# EAGLE board pocketbone (EAGLE 7.5.0)
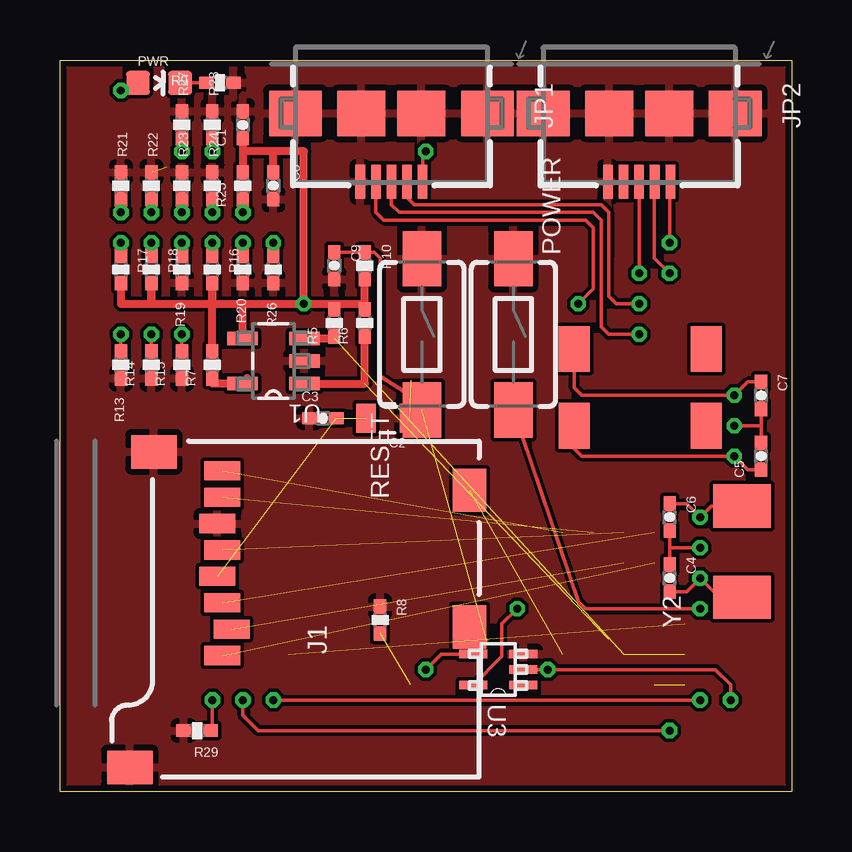
[diagram p0: board, top side]
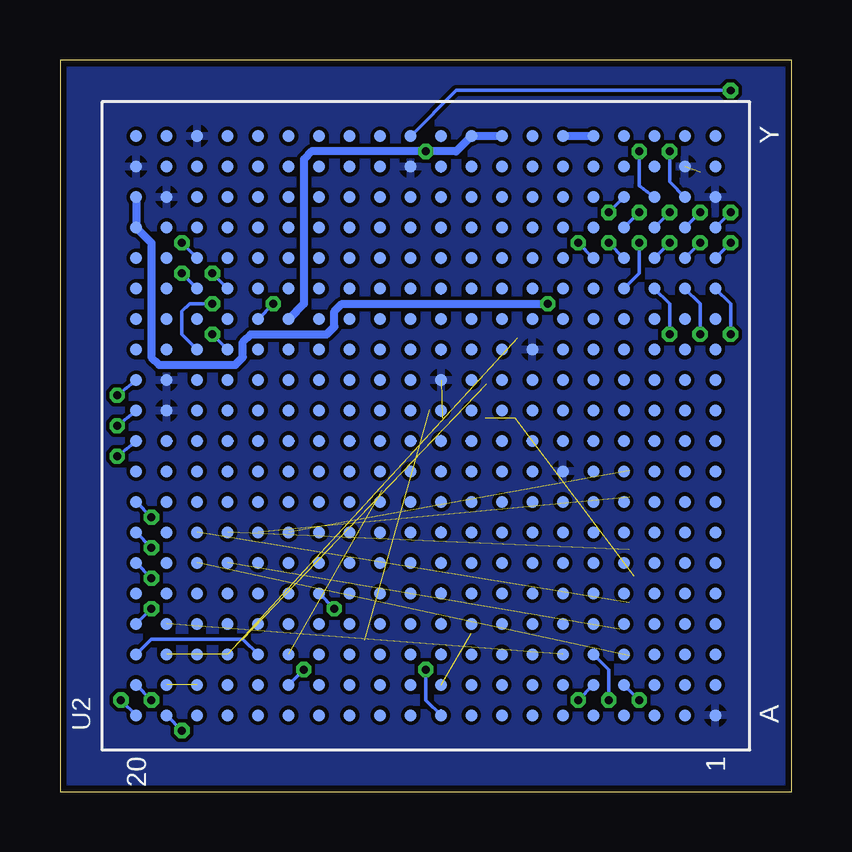
[diagram p1: board, bottom side, seen from below]

Size 30.48 x 30.48 mm. Coordinates in mm from the lower left corner, seen from the top.
Outline: 30.48,0 0,0 0,30.48 30.48,30.48 30.48,0
Copper layers (1*16): Top 0.035mm / dielectric 1.5mm / Bottom 0.035mm
Design rules "SeeedStudio_2layer_DRU_no_angle_20140221": minimum track width 6mil, minimum drill 12mil, track to track 6mil, track to pad 6mil, pad to pad 6mil, via to via 6mil, smd to smd 0mil, copper to edge 10mil, drill to drill 10mil, minimum pad ring 10mil, minimum via ring 6mil, stop-mask expansion 2mil, vias tented up to drill 100mil, thermal gap 10mil
Net classes: 0 default: width 0.152 mm, drill 0.33 mm, clearance 0.152 mm; 1 ground: width 0.33 mm, drill 0.33 mm, clearance 0.152 mm; 2 usb: width 0.152 mm, clearance 0.152 mm; 3 power: width 0.33 mm, drill 0.33 mm, clearance 0.152 mm

## Footprints (pad centres in the part's own frame; a part is rotated, then mirrored left to right if it is on the bottom)
0402-CAP = smd 0.61 x 0.508: 1 -0.559,0; 2 0.559,0
0805 = smd 0.8 x 1.2: 1 -0.9,0; 2 0.9,0
MICRO-SD-SOCKET-PP = smd 1.8 x 1.4: CD1 -2.05,0.4; CD2 -7.75,0.4 | smd 0.8 x 1.5: CD/DAT3 -7.84,10.3; CLK -4.54,10.7; CMD -6.74,10.7; DAT0 -2.34,10.7; DAT1 -1.24,10.7; DAT2 -8.94,10.7; GND -3.44,10.9; VCC -5.64,10.9 | smd 1.4 x 1.9: GND1 -13.6,14.55; GND3 -0.45,13.55
USB-AB-MICRO-SMD = smd 1.4 x 0.4: D+ 2.85,0; D- 2.85,0.65; GND 2.85,-1.3; ID 2.85,-0.65; VBUS 2.85,1.3 | smd 1.9 x 2.2: SHIELD1 0,4; SHIELD4 0,-4 | smd 1.9 x 2: SHIELD2 0,1.25; SHIELD3 0,-1.25
TACTILE-SWITCH-1101NE = smd 2.3 x 1.6: 1 -3.15,0; 2 3.15,0
LED-0603 = smd 1 x 1: A 0,-0.877; C 0,0.877
0402-RES = smd 0.61 x 0.508: 1 -0.559,0; 2 0.559,0
SOT95P290X145-5N = smd 1.27 x 0.559: 1 -1.295,0.94; 2 -1.295,0; 3 -1.295,-0.94; 4 1.295,-0.94; 5 1.295,0.94
OSD3358 = smd 0.5 x 0.5: A1 -12.065,-12.065; A2 -12.065,-10.795; A3 -12.065,-9.525; A4 -12.065,-8.255; A5 -12.065,-6.985; A6 -12.065,-5.715; A7 -12.065,-4.445; A8 -12.065,-3.175; A9 -12.065,-1.905; A10 -12.065,-0.635; A11 -12.065,0.635; A12 -12.065,1.905; A13 -12.065,3.175; A14 -12.065,4.445; A15 -12.065,5.715; A16 -12.065,6.985; A17 -12.065,8.255; A18 -12.065,9.525; A19 -12.065,10.795; A20 -12.065,12.065; B1 -10.795,-12.065; B2 -10.795,-10.795; B3 -10.795,-9.525; B4 -10.795,-8.255; B5 -10.795,-6.985; B6 -10.795,-5.715; B7 -10.795,-4.445; B8 -10.795,-3.175; B9 -10.795,-1.905; B10 -10.795,-0.635; B11 -10.795,0.635; B12 -10.795,1.905; B13 -10.795,3.175; B14 -10.795,4.445; B15 -10.795,5.715; B16 -10.795,6.985; B17 -10.795,8.255; B18 -10.795,9.525; B19 -10.795,10.795; B20 -10.795,12.065; C1 -9.525,-12.065; C2 -9.525,-10.795; C3 -9.525,-9.525; C4 -9.525,-8.255; C5 -9.525,-6.985; C6 -9.525,-5.715; C7 -9.525,-4.445; C8 -9.525,-3.175; C9 -9.525,-1.905; C10 -9.525,-0.635; C11 -9.525,0.635; C12 -9.525,1.905; C13 -9.525,3.175; C14 -9.525,4.445; C15 -9.525,5.715; C16 -9.525,6.985; C17 -9.525,8.255; C18 -9.525,9.525; C19 -9.525,10.795; C20 -9.525,12.065; D1 -8.255,-12.065; D2 -8.255,-10.795; D3 -8.255,-9.525; D4 -8.255,-8.255; D5 -8.255,-6.985; D6 -8.255,-5.715; D7 -8.255,-4.445; D8 -8.255,-3.175; D9 -8.255,-1.905; D10 -8.255,-0.635; D11 -8.255,0.635; D12 -8.255,1.905; D13 -8.255,3.175; D14 -8.255,4.445; D15 -8.255,5.715; D16 -8.255,6.985; D17 -8.255,8.255; D18 -8.255,9.525; D19 -8.255,10.795; D20 -8.255,12.065; E1 -6.985,-12.065; E2 -6.985,-10.795; E3 -6.985,-9.525; E4 -6.985,-8.255; E5 -6.985,-6.985; E6 -6.985,-5.715; E7 -6.985,-4.445; E8 -6.985,-3.175; E9 -6.985,-1.905; E10 -6.985,-0.635; E11 -6.985,0.635; E12 -6.985,1.905; E13 -6.985,3.175; E14 -6.985,4.445; E15 -6.985,5.715; E16 -6.985,6.985; E17 -6.985,8.255; E18 -6.985,9.525; E19 -6.985,10.795; E20 -6.985,12.065; F1 -5.715,-12.065; F2 -5.715,-10.795; F3 -5.715,-9.525; F4 -5.715,-8.255; F5 -5.715,-6.985; F6 -5.715,-5.715; F7 -5.715,-4.445; F8 -5.715,-3.175; F9 -5.715,-1.905; F10 -5.715,-0.635; F11 -5.715,0.635; F12 -5.715,1.905; F13 -5.715,3.175; F14 -5.715,4.445; F15 -5.715,5.715; F16 -5.715,6.985; F17 -5.715,8.255; F18 -5.715,9.525; F19 -5.715,10.795; F20 -5.715,12.065; G1 -4.445,-12.065; G2 -4.445,-10.795; G3 -4.445,-9.525; G4 -4.445,-8.255; G5 -4.445,-6.985; G6 -4.445,-5.715; G7 -4.445,-4.445; G8 -4.445,-3.175; G9 -4.445,-1.905; G10 -4.445,-0.635; G11 -4.445,0.635; G12 -4.445,1.905; G13 -4.445,3.175; G14 -4.445,4.445; G15 -4.445,5.715; G16 -4.445,6.985; G17 -4.445,8.255; G18 -4.445,9.525; G19 -4.445,10.795; G20 -4.445,12.065; H1 -3.175,-12.065; H2 -3.175,-10.795; H3 -3.175,-9.525; H4 -3.175,-8.255; H5 -3.175,-6.985; H6 -3.175,-5.715; H7 -3.175,-4.445; H8 -3.175,-3.175; H9 -3.175,-1.905; H10 -3.175,-0.635; H11 -3.175,0.635; H12 -3.175,1.905; H13 -3.175,3.175; H14 -3.175,4.445; H15 -3.175,5.715; H16 -3.175,6.985; H17 -3.175,8.255; H18 -3.175,9.525; H19 -3.175,10.795; H20 -3.175,12.065; J1 -1.905,-12.065; J2 -1.905,-10.795; J3 -1.905,-9.525; J4 -1.905,-8.255; J5 -1.905,-6.985; J6 -1.905,-5.715; J7 -1.905,-4.445; J8 -1.905,-3.175; J9 -1.905,-1.905; J10 -1.905,-0.635; J11 -1.905,0.635; J12 -1.905,1.905; J13 -1.905,3.175; J14 -1.905,4.445; J15 -1.905,5.715; J16 -1.905,6.985; J17 -1.905,8.255; J18 -1.905,9.525; J19 -1.905,10.795; J20 -1.905,12.065; K1 -0.635,-12.065; K2 -0.635,-10.795; K3 -0.635,-9.525; K4 -0.635,-8.255; K5 -0.635,-6.985; K6 -0.635,-5.715; K7 -0.635,-4.445; K8 -0.635,-3.175; K9 -0.635,-1.905; K10 -0.635,-0.635; K11 -0.635,0.635; K12 -0.635,1.905; K13 -0.635,3.175; K14 -0.635,4.445; K15 -0.635,5.715; K16 -0.635,6.985; K17 -0.635,8.255; K18 -0.635,9.525; K19 -0.635,10.795; K20 -0.635,12.065; L1 0.635,-12.065; L2 0.635,-10.795; L3 0.635,-9.525; L4 0.635,-8.255; L5 0.635,-6.985; L6 0.635,-5.715; L7 0.635,-4.445; L8 0.635,-3.175; L9 0.635,-1.905; L10 0.635,-0.635; L11 0.635,0.635; L12 0.635,1.905; L13 0.635,3.175; L14 0.635,4.445; L15 0.635,5.715; L16 0.635,6.985; L17 0.635,8.255; L18 0.635,9.525; L19 0.635,10.795; L20 0.635,12.065; M1 1.905,-12.065; M2 1.905,-10.795; M3 1.905,-9.525; M4 1.905,-8.255; M5 1.905,-6.985; M6 1.905,-5.715; M7 1.905,-4.445; M8 1.905,-3.175; M9 1.905,-1.905; M10 1.905,-0.635; M11 1.905,0.635; M12 1.905,1.905; M13 1.905,3.175; M14 1.905,4.445; M15 1.905,5.715; M16 1.905,6.985; M17 1.905,8.255; M18 1.905,9.525; M19 1.905,10.795; M20 1.905,12.065; N1 3.175,-12.065; N2 3.175,-10.795; N3 3.175,-9.525; N4 3.175,-8.255; N5 3.175,-6.985; N6 3.175,-5.715; N7 3.175,-4.445; N8 3.175,-3.175; N9 3.175,-1.905; N10 3.175,-0.635; N11 3.175,0.635; N12 3.175,1.905; N13 3.175,3.175; N14 3.175,4.445; N15 3.175,5.715; N16 3.175,6.985; N17 3.175,8.255; N18 3.175,9.525; N19 3.175,10.795; N20 3.175,12.065; P1 4.445,-12.065; P2 4.445,-10.795; P3 4.445,-9.525; P4 4.445,-8.255; P5 4.445,-6.985; P6 4.445,-5.715; P7 4.445,-4.445; P8 4.445,-3.175; P9 4.445,-1.905; P10 4.445,-0.635; P11 4.445,0.635; P12 4.445,1.905; P13 4.445,3.175; P14 4.445,4.445; P15 4.445,5.715; P16 4.445,6.985; P17 4.445,8.255; P18 4.445,9.525; P19 4.445,10.795; P20 4.445,12.065; R1 5.715,-12.065; R2 5.715,-10.795; R3 5.715,-9.525; R4 5.715,-8.255; R5 5.715,-6.985; R6 5.715,-5.715; R7 5.715,-4.445; R8 5.715,-3.175; R9 5.715,-1.905; R10 5.715,-0.635; R11 5.715,0.635; R12 5.715,1.905; R13 5.715,3.175; R14 5.715,4.445; R15 5.715,5.715; R16 5.715,6.985; R17 5.715,8.255; R18 5.715,9.525; R19 5.715,10.795; R20 5.715,12.065; T1 6.985,-12.065; T2 6.985,-10.795; T3 6.985,-9.525; T4 6.985,-8.255; T5 6.985,-6.985; T6 6.985,-5.715; T7 6.985,-4.445; T8 6.985,-3.175; T9 6.985,-1.905; T10 6.985,-0.635; T11 6.985,0.635; T12 6.985,1.905; T13 6.985,3.175; T14 6.985,4.445; T15 6.985,5.715; T16 6.985,6.985; T17 6.985,8.255; T18 6.985,9.525; T19 6.985,10.795; T20 6.985,12.065; U1 8.255,-12.065; U2 8.255,-10.795; U3 8.255,-9.525; U4 8.255,-8.255; U5 8.255,-6.985; U6 8.255,-5.715; U7 8.255,-4.445; U8 8.255,-3.175; U9 8.255,-1.905; U10 8.255,-0.635; U11 8.255,0.635; U12 8.255,1.905; U13 8.255,3.175; U14 8.255,4.445; U15 8.255,5.715; U16 8.255,6.985; U17 8.255,8.255; U18 8.255,9.525; U19 8.255,10.795; U20 8.255,12.065; V1 9.525,-12.065; V2 9.525,-10.795; V3 9.525,-9.525; V4 9.525,-8.255; V5 9.525,-6.985; V6 9.525,-5.715; V7 9.525,-4.445; V8 9.525,-3.175; V9 9.525,-1.905; V10 9.525,-0.635; V11 9.525,0.635; V12 9.525,1.905; V13 9.525,3.175; V14 9.525,4.445; V15 9.525,5.715; V16 9.525,6.985; V17 9.525,8.255; V18 9.525,9.525; V19 9.525,10.795; V20 9.525,12.065; W1 10.795,-12.065; W2 10.795,-10.795; W3 10.795,-9.525; W4 10.795,-8.255; W5 10.795,-6.985; W6 10.795,-5.715; W7 10.795,-4.445; W8 10.795,-3.175; W9 10.795,-1.905; W10 10.795,-0.635; W11 10.795,0.635; W12 10.795,1.905; W13 10.795,3.175; W14 10.795,4.445; W15 10.795,5.715; W16 10.795,6.985; W17 10.795,8.255; W18 10.795,9.525; W19 10.795,10.795; W20 10.795,12.065; Y1 12.065,-12.065; Y2 12.065,-10.795; Y3 12.065,-9.525; Y4 12.065,-8.255; Y5 12.065,-6.985; Y6 12.065,-5.715; Y7 12.065,-4.445; Y8 12.065,-3.175; Y9 12.065,-1.905; Y10 12.065,-0.635; Y11 12.065,0.635; Y12 12.065,1.905; Y13 12.065,3.175; Y14 12.065,4.445; Y15 12.065,5.715; Y16 12.065,6.985; Y17 12.065,8.255; Y18 12.065,9.525; Y19 12.065,10.795; Y20 12.065,12.065
DCK5 = smd 1.168 x 0.356: 1 -1.041,0.65; 2 -1.041,0; 3 -1.041,-0.65; 4 1.041,-0.65; 5 1.041,0.65
CM200C-32.768KAZF-UT = smd 1.3 x 1.9: 1 1.27,2.54; 2 1.27,5.74; 3 6.77,2.54; 4 6.77,5.74
445C33D24M00000 = smd 1.8 x 2.4: 1 1.27,2.54; 2 5.07,2.54

## Placement (x,y rotation side)
C1  0.1uF  [0402-CAP]  7.62,27.78 90 top
C2  10uF  [0805]  13.65,15.56 180 top
C3  0.1uF  [0402-CAP]  10.95,15.56 0 top
C4  20pF  [0402-CAP]  25.4,8.89 270 top
C5  20pF  [0402-CAP]  29.21,13.97 90 top
C6  20pF  [0402-CAP]  25.4,11.43 270 top
C7  20pF  [0402-CAP]  29.21,16.51 270 top
C8  0.1uF  [0402-CAP]  8.89,25.24 270 top
C9  1uF  [0402-CAP]  11.43,21.91 270 top
J1  USD_CONNECTOR  [MICRO-SD-SOCKET-PP]  17.46,14.6 90 top
JP1  [USB-AB-MICRO-SMD]  13.81,28.26 270 top
JP2  [USB-AB-MICRO-SMD]  24.13,28.26 270 top
POWER  SWITCH-MOMENTARY-2SMD-1101NE  [TACTILE-SWITCH-1101NE]  18.89,19.05 270 top
PWR  BLUE  [LED-0603]  4.13,29.53 270 top
R5  1.5K,1%  [0402-RES]  11.43,19.53 90 top
R6  1.5K,1%  [0402-RES]  12.7,19.53 90 top
R7  1.5K,1%  [0402-RES]  6.35,17.78 90 top
R8  4.87k  [0402-RES]  13.34,7.14 270 top
R9  4.87k  [0402-RES]  6.67,29.53 180 top
R10  10K,1%  [0402-RES]  12.7,21.91 270 top
R13  100K,1%  [0402-RES]  2.54,17.78 90 top
R14  100K,1%  [0402-RES]  3.81,17.78 90 top
R15  100K,1%  [0402-RES]  5.08,17.78 90 top
R16  100K,1%  [0402-RES]  6.35,21.75 270 top
R17  100K,1%  [0402-RES]  2.54,21.75 270 top
R18  100K,1%  [0402-RES]  3.81,21.75 270 top
R19  100K,1%  [0402-RES]  5.08,21.75 90 top
R20  100K,1%  [0402-RES]  7.62,21.75 90 top
R21  100K,1%  [0402-RES]  2.54,25.24 270 top
R22  100K,1%  [0402-RES]  3.81,25.24 270 top
R23  100K,1%  [0402-RES]  5.08,25.24 270 top
R24  100K,1%  [0402-RES]  6.35,25.24 270 top
R25  100K,1%  [0402-RES]  7.62,25.24 90 top
R26  100K,1%  [0402-RES]  8.89,21.75 90 top
R27  100K,1%  [0402-RES]  5.08,27.78 270 top
R28  100K,1%  [0402-RES]  6.35,27.78 270 top
R29  10K,1%  [0402-RES]  5.71,2.54 180 top
RESET  SWITCH-MOMENTARY-2SMD-1101NE  [TACTILE-SWITCH-1101NE]  15.08,19.05 270 top
U1  24LC_32AT-I/OT  [SOT95P290X145-5N]  8.89,17.94 180 top
U2  OSD3358  [OSD3358]  15.24,15.24 90 bottom
U3  SN74LVC1G07_DCK_5  [DCK5]  18.26,5.08 180 top
Y1  CM200C-32.768KAZF-UT  [CM200C-32.768KAZF-UT]  20.16,12.7 0 top
Y2  445C33D24M00000  [445C33D24M00000]  30.96,6.83 90 top

## Library data of the parts
C1-C9 R5-R10 R13-R29 = Strawson_Eagle_Lib
J1 = pocketbone; PROD_ID: CONN-07820
JP1 JP2 U2 Y1 Y2 = pocketbone
POWER RESET = SparkFun-Electromechanical; PROD_ID: SWCH-00815
PWR = BeagleBone_Blue
U1 = pocketbone; MPN: 24LC32AT-I/OT; OC_FARNELL: 1700993; OC_NEWARK: 08P0113; PACKAGE: SOT-23-5; SUPPLIER: MICROCHIP
U3 = pocketbone; DATASHEETURL: http://www.ti.com/lit/gpn/SN74LVC1G07; DESCRIPTION: Single Buffer/Driver With Open-Drain Output; FAMILY_NAME: LL BUFFER AND DRIVER WITH OPEN-DRAIN OUTPUT; GENERIC_PART_NUMBER: SN74LVC1G07; INDUSTRY_STD_PKG_TYPE: SC70; MANUFACTURER: Texas Instruments; MANUFACTURER_PART_NUMBER: sn74lvc1g07_dck_5; PACKAGE_DESIGNATOR: DCK; PIN_COUNT: 5; VENDOR: Texas Instruments

## Nets
3.3V [power]: C1.1 C8.1 R5.2 R6.2 R7.2 R10.2 R16.2 R17.2 R18.2 R25.2 U1.4 U2.U20 U2.V20
5.0V [power]: U2.Y5 U2.Y6
BATT_LED_2: R26.2 U2.T5
EQEP_1A: R27.2 U2.V2
EQEP_1B: R28.2 U2.V3
GND [ground]: C1.2 C2.1 C3.1 C8.2 C9.2 J1.GND J1.GND1 J1.GND3 JP1.GND JP1.SHIELD1 JP1.SHIELD2 JP1.SHIELD3 JP1.SHIELD4 JP2.GND JP2.SHIELD1 JP2.SHIELD2 JP2.SHIELD3 JP2.SHIELD4 POWER.1 R8.1 R9.1 R13.1 R14.1 R15.1 R19.1 R20.1 R21.1 R22.1 R23.1 R24.1 R26.1 R27.1 R28.1 R29.2 RESET.1 U1.2 U2.A1 U2.J6 U2.L19 U2.M10 U2.M19 U2.N7 U2.V1 U2.V19 U2.W2 U2.W11 U2.W20 U2.Y18 U3.3
I2C0_SCL: R6.1 U1.1 U2.C16 U2.C20
I2C0_SDA: R5.1 U1.3 U2.C17 U2.C19
LCD_DATA_14: R25.1 U2.V4
LDO_PGOOD: U2.B5 U2.B20
MDIR_2B: R24.2 U2.U4
MDIR_3A: R16.1 U2.R4
MDIR_3B: R15.2 U2.R3
MDIR_4A: R13.2 U2.R1
MDIR_4B: R14.2 U2.R2
N$1: JP2.D+ U2.R17
N$2: J1.CLK U2.G17
N$4: JP2.D- U2.R18
N$5: J1.CD/DAT3 U2.F17
N$6: JP2.VBUS U2.T18
N$12: U2.C6 U2.D19
N$26: C7.1 U2.M20 Y1.2
N$27: C5.1 U2.K20 Y1.1
N$28: R7.1 U1.5
N$31: C5.2 C7.2 U2.L20
N$32: C6.1 U2.H20 Y2.2
N$33: C4.2 U2.F20 Y2.1
N$34: C4.1 C6.2 U2.G20
N$42: R8.2 U2.B10
N$70: J1.DAT1 U2.G15
N$74: J1.CMD U2.G18
N$75: J1.CD1 U2.C15
N$77: J1.DAT0 U2.G16
N$131: R29.1 U2.B4
NTE: J1.DAT2 U2.F18
PMIC_INT: U2.B18 U2.B19
PMIC_NWAKEUP: U2.A19 U2.C5
PMIC_PGOOD: U2.A20 U2.B15 U3.2
PWR: POWER.2 U2.D20
PWR_LEDR: PWR.C R9.2
RESET: C9.1 R10.1 RESET.2 U2.A10 U3.4
SERVO_EN: R23.2 U2.U3
SVO5: R19.2 U2.T3
SVO6: R20.2 U2.T4
SVO7: R17.1 U2.T1
SVO8: R18.1 U2.T2
UART5_RX: R22.2 U2.U2
UART5_TX: R21.2 U2.U1
USB0_DM [usb]: JP1.D- U2.N18
USB0_DP [usb]: JP1.D+ U2.N17
USB0_ID: JP1.ID U2.P16
USB_DC [power]: JP1.VBUS U2.P15 U2.Y8 U2.Y9
VCC_3V3B: C2.2 C3.2 J1.VCC
VDD_3V3AUX: PWR.A U2.Y11
VDD_RTC: U2.E14 U3.5
VIN_BAT_0: U2.Y2
VIN_BAT_1: U2.Y3
VOUT_LDO3_1P8V_0: U2.N16
VOUT_LDO3_1P8V_1: U2.R16
VOUT_SYS_5V_0: U2.W4
VOUT_SYS_5V_1: U2.Y4

## Tracks (layer width: path | path; a pad name or v marks a point on that pad's centre or on a via)
3.3V  (via drill 0.33)
  Top 0.33: R17.2 2.54,20.32 3.81,20.32 | 3.81,20.32 R18.2 3.81,20.32 | 3.81,20.32 6.35,20.32 | 6.35,20.32 R16.2 6.35,20.32 | 6.35,20.32 7.62,20.32 | 7.62,20.32 8.26,20.32 9.68,20.32 v10.16,20.32 | 7.62,26.67 R25.2 | v10.16,20.32 10.16,26.67 8.89,26.67 | 8.89,26.67 7.62,26.67 | C8.1 8.89,26.67 | R7.2 6.35,20.32 | U1.4 7.62,19.2 7.62,20.32 | v10.16,20.32 10.48,20.32 | 10.48,20.32 11.43,20.32 | 11.43,20.32 R5.2 11.43,20.32 | 11.43,20.32 11.91,20.32 12.7,20.32 | 12.7,20.32 R6.2 | C1.1 7.62,26.67 | 12.7,20.32 R10.2 | v10.16,20.32 10.48,20.32
  Bottom 0.33: U2.V20 U2.U20 26.67,22.86 26.67,18.1 26.35,17.78 23.18,17.78 22.86,18.1 22.86,18.73 22.54,19.05 19.37,19.05 19.05,19.37 19.05,20 18.73,20.32 v10.16,20.32
5.0V
  Bottom 0.33: U2.Y5 U2.Y6
BATT_LED_2  (via drill 0.33)
  Top 0.152: v8.89,22.86 R26.2
  Bottom 0.152: U2.T5 v8.89,22.86
EQEP_1A  (via drill 0.33)
  Top 0.152: R27.2 v5.08,26.67
  Bottom 0.152: v5.08,26.67 5.08,25.4 U2.V2
EQEP_1B  (via drill 0.33)
  Top 0.152: R28.2 v6.35,26.67
  Bottom 0.152: v6.35,26.67 6.35,25.24 U2.V3
GND  (2 unrouted)
  pour Top: 30.48,30.48 0,30.48 0,0 30.48,0
  pour Bottom: 30.48,30.48 0,30.48 0,0 30.48,0
I2C0_SCL  (1 unrouted)
  Top 0.33: U1.1 12.7,17 R6.1
  Bottom 0.152: U2.C20 26.67,6.35 22.86,6.35 U2.C16
I2C0_SDA  (2 unrouted)
  Top 0.33: U1.3 11.43,18.88 R5.1
LCD_DATA_14  (via drill 0.33)
  Top 0.152: v7.62,24.13 R25.1
  Bottom 0.152: U2.V4 v7.62,24.13
LDO_PGOOD  (via drill 0.33)
  Top 0.152: v8.89,3.81 v26.67,3.81
  Bottom 0.152: U2.B5 v8.89,3.81 | v26.67,3.81 U2.B20
MDIR_2B  (via drill 0.33)
  Top 0.152: R24.2 v6.35,24.13
  Bottom 0.152: v6.35,24.13 U2.U4
MDIR_3A  (via drill 0.33)
  Top 0.152: R16.1 v6.35,22.86
  Bottom 0.152: v6.35,22.86 6.35,21.59 U2.R4
MDIR_3B  (via drill 0.33)
  Top 0.152: v5.08,19.05 R15.2
  Bottom 0.152: U2.R3 5.08,20.32 v5.08,19.05
MDIR_4A  (via drill 0.33)
  Top 0.152: v2.54,19.05 R13.2
  Bottom 0.152: U2.R1 2.54,20.32 v2.54,19.05
MDIR_4B  (via drill 0.33)
  Top 0.152: v3.81,19.05 R14.2
  Bottom 0.152: U2.R2 3.81,20.32 v3.81,19.05
N$1  (via drill 0.33)
  Top 0.152: v24.13,21.59 JP2.D+
  Bottom 0.152: U2.R17 v24.13,21.59
N$2  (1 unrouted)
N$4  (via drill 0.33)
  Top 0.152: v25.4,21.59 24.77,22.23 24.77,25.41 JP2.D-
  Bottom 0.152: U2.R18 v25.4,21.59
N$5  (1 unrouted)
N$6  (via drill 0.33)
  Top 0.152: JP2.VBUS 25.4,25.38 v25.4,22.86
  Bottom 0.152: v25.4,22.86 U2.T18
N$12  (1 unrouted)
N$26  (via drill 0.33)
  Top 0.152: Y1.2 21.43,16.83 21.75,16.51 v28.1,16.51 28.66,17.07 C7.1
  Bottom 0.152: U2.M20 v28.1,16.51
N$27  (via drill 0.33)
  Top 0.152: Y1.1 21.43,14.29 21.75,13.97 v28.1,13.97 28.66,13.41 C5.1
  Bottom 0.152: U2.K20 v28.1,13.97
N$28
  Top 0.33: 7.79,17.22 U1.5 6.35,17 R7.1
N$31  (via drill 0.33)
  Top 0.152: C7.2 29.21,15.24 | 29.21,15.24 C5.2 | v28.1,15.24 29.21,15.24
  Bottom 0.152: U2.L20 v28.1,15.24
N$32  (via drill 0.33)
  Top 0.152: C6.1 26.11,11.99 v26.67,11.43 27.14,11.9 Y2.2
  Bottom 0.152: v26.67,11.43 U2.H20
N$33  (via drill 0.33)
  Top 0.152: C4.2 26.11,8.33 v26.67,8.89 27.46,8.1 Y2.1
  Bottom 0.152: v26.67,8.89 U2.F20
N$34  (via drill 0.33)
  Top 0.152: C6.2 25.4,10.16 | 25.4,10.16 C4.1 | v26.67,10.16 25.4,10.16
  Bottom 0.152: U2.G20 v26.67,10.16
N$42  (1 unrouted)
N$70  (1 unrouted)
N$74  (1 unrouted)
N$75  (1 unrouted)
N$77  (1 unrouted)
N$131  (via drill 0.33)
  Top 0.152: v6.35,3.81 6.35,2.54 R29.1
  Bottom 0.152: U2.B4 v6.35,3.81
NTE  (1 unrouted)
PMIC_INT  (1 unrouted)
PMIC_NWAKEUP  (via drill 0.33)
  Top 0.152: v25.4,2.54 10.16,2.54 9.53,2.54 8.26,2.54 7.62,3.18 v7.62,3.81
  Bottom 0.152: U2.A19 v25.4,2.54 | U2.C5 7.62,5.08 v7.62,3.81
PMIC_PGOOD  (via drill 0.33)
  Top 0.152: U3.2 v20.32,5.08 26.67,5.08 27.3,5.08 27.94,4.45 v27.94,3.81
  Bottom 0.152: U2.B15 v20.32,5.08 | U2.A20 v27.94,3.81
PWR  (via drill 0.33)
  Top 0.152: POWER.2 21.59,7.94 21.91,7.62 v26.67,7.62
  Bottom 0.152: v26.67,7.62 U2.D20
PWR_LEDR
  Top 0.152: PWR.C R9.2
RESET  (via drill 0.33)  (1 unrouted)
  Top 0.152: 17.16,5.73 U3.4 | v15.24,5.08 15.89,5.73 U3.4 | 17.78,6.29 U3.4 | C9.1 R10.1 13.09,22.47 13.34,22.23 13.34,17.3 15.08,16.19 RESET.2
  Bottom 0.152: U2.A10 15.24,3.81 v15.24,5.08
SERVO_EN  (via drill 0.33)
  Top 0.152: v5.08,24.13 R23.2
  Bottom 0.152: U2.U3 v5.08,24.13
SVO5  (via drill 0.33)
  Top 0.152: v5.08,22.86 R19.2
  Bottom 0.152: U2.T3 v5.08,22.86
SVO6  (via drill 0.33)
  Top 0.152: v7.62,22.86 R20.2
  Bottom 0.152: U2.T4 v7.62,22.86
SVO7  (via drill 0.33)
  Top 0.152: v2.54,22.86 R17.1
  Bottom 0.152: U2.T1 v2.54,22.86
SVO8  (via drill 0.33)
  Top 0.152: v3.81,22.86 R18.1
  Bottom 0.152: U2.T2 v3.81,22.86
UART5_RX  (via drill 0.33)
  Top 0.152: R22.2 v3.81,24.13
  Bottom 0.152: v3.81,24.13 U2.U2
UART5_TX  (via drill 0.33)
  Top 0.152: R21.2 v2.54,24.13
  Bottom 0.152: U2.U1 v2.54,24.13
USB0_DM  (via drill 0.33)
  Top 0.152: JP1.D- 14.46,24.75 14.76,24.45 22.54,24.45 22.86,24.13 22.86,22.23 22.86,22.07 22.86,20.64 23.18,20.32 v24.13,20.32
  Bottom 0.152: U2.N18 25.4,19.05 25.4,20 25.08,20.32 v24.13,20.32
USB0_DP  (via drill 0.33)
  Top 0.152: v24.13,19.05 22.86,19.05 22.54,19.37 22.54,23.81 22.23,24.13 14.13,24.13 13.81,24.45 JP1.D+
  Bottom 0.152: U2.N17 v24.13,19.05
USB0_ID  (via drill 0.33)
  Top 0.152: v21.59,20.32 22.23,20.95 22.23,23.49 21.91,23.81 13.49,23.81 13.16,24.15 JP1.ID
  Bottom 0.152: v21.59,20.32 U2.P16
USB_DC  (via drill 0.33)
  Top 0.152: JP1.VBUS 15.11,26.54 v15.24,26.67
  Bottom 0.152: v15.24,26.67 15.4,26.67
  Bottom 0.33: U2.Y8 U2.Y9 13.97,26.67 v15.24,26.67 15.4,26.67 20,26.67 20.32,26.35 20.32,25.4 20.32,20.32 U2.P15
VCC_3V3B  (2 unrouted)
VDD_3V3AUX  (via drill 0.33)
  Top 0.152: v2.54,29.21 3.09,29.21 PWR.A
  Bottom 0.152: U2.Y11 13.97,29.21 8.89,29.21 v2.54,29.21
VDD_RTC  (via drill 0.33)
  Top 0.152: v19.05,7.62 18.41,6.99 18.41,5.63 U3.5
  Bottom 0.152: U2.E14 v19.05,7.62